# EAGLE board Line sensors - 6 (EAGLE 9.5.2)
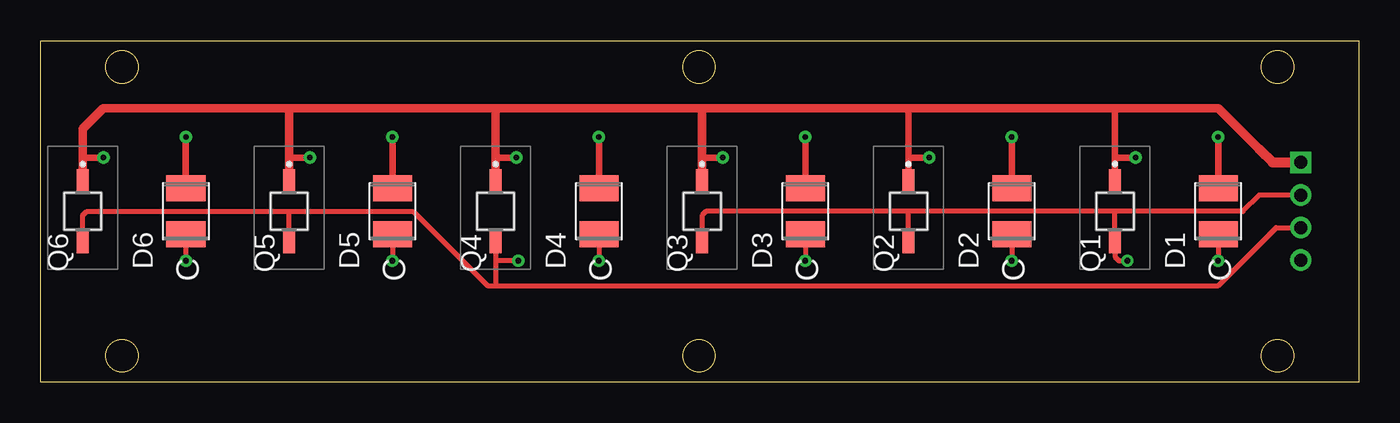
[diagram p0: board, top side]
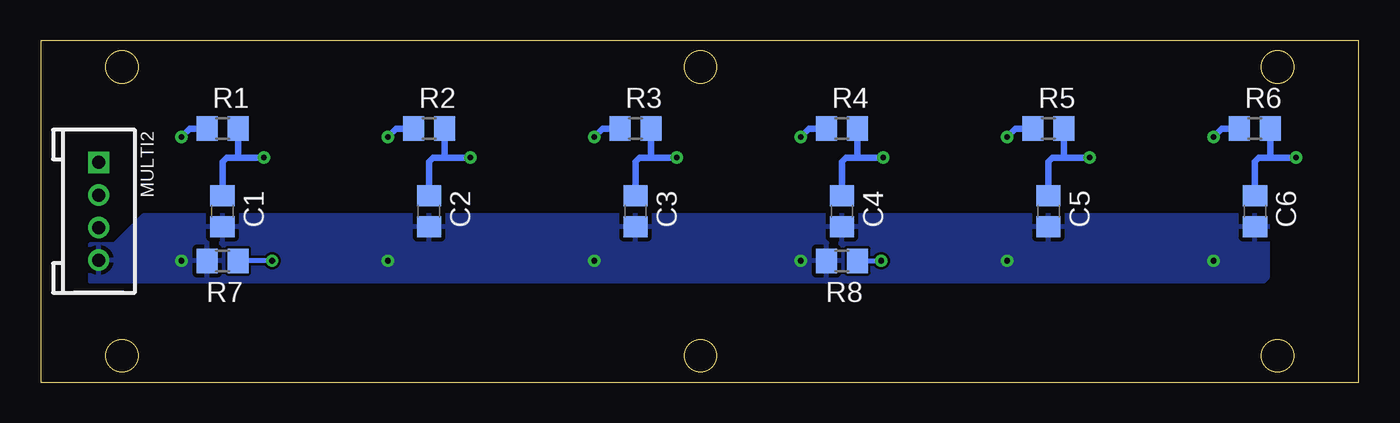
[diagram p1: board, bottom side, seen from below]

Size 81.09 x 21 mm. Coordinates in mm from the lower left corner, seen from the top.
Outline: 81.09,21 81.09,0 0,0 0,21 81.09,21
Outline: circle at 76.09,1.62 radius 1
Outline: circle at 76.09,19.38 radius 1
Outline: circle at 76.09,19.38 radius 1
Outline: circle at 5,19.38 radius 1
Outline: circle at 76.09,1.62 radius 1
Outline: circle at 40.5,19.38 radius 1
Outline: circle at 5,1.62 radius 1
Outline: circle at 40.5,1.62 radius 1
Outline: circle at 5,1.62 radius 1
Outline: circle at 40.5,1.62 radius 1
Outline: circle at 40.5,19.38 radius 1
Outline: circle at 5,19.38 radius 1
Copper layers (1*16): Top 0.035mm / dielectric 1.5mm / Bottom 0.035mm
Design rules "default": minimum track width 6mil, minimum drill 0.35mm, track to track 6mil, track to pad 6mil, pad to pad 6mil, via to via 6mil, smd to smd 6mil, copper to edge 40mil, drill to drill 6mil, minimum pad ring 10mil, minimum via ring 8mil, stop-mask expansion 4mil, vias tented up to drill 0mil, thermal gap 10mil

## Footprints (pad centres in the part's own frame; a part is rotated, then mirrored left to right if it is on the bottom)
C0805 = smd 1.3 x 1.5: 1 -0.95,0; 2 0.95,0
3528-2PIN = smd 1.6 x 2.4: 1 -1.425,0; 2 1.425,0
2.0_1X4 = drill 0.8 pad 1.27 square: 1 -3,0 | drill 0.8 pad 1.27: 2 -1,0; 3 1,0; 4 3,0
VEMT2520X01 = smd 1.35 x 0.75: 1 -1.9,0; 2 1.9,0
R0805 = smd 1.3 x 1.5: 1 -0.95,0; 2 0.95,0

## Placement (x,y rotation side)
C1  [C0805]  69.9,10.51 270 bottom
C2  [C0805]  57.2,10.51 270 bottom
C3  [C0805]  44.5,10.51 270 bottom
C4  [C0805]  31.8,10.51 270 bottom
C5  [C0805]  19.1,10.51 270 bottom
C6  [C0805]  6.4,10.51 270 bottom
D1  [3528-2PIN]  72.44,10.51 90 top
D2  [3528-2PIN]  59.74,10.51 90 top
D3  [3528-2PIN]  47.04,10.51 90 top
D4  [3528-2PIN]  34.34,10.51 90 top
D5  [3528-2PIN]  21.64,10.51 90 top
D6  [3528-2PIN]  8.94,10.51 90 top
MULTI2  TWIG_2.0  [2.0_1X4]  77.52,10.51 270 bottom
Q1  VEMT2520X01  [VEMT2520X01]  66.09,10.51 270 top
Q2  VEMT2520X01  [VEMT2520X01]  53.39,10.51 270 top
Q3  VEMT2520X01  [VEMT2520X01]  40.69,10.51 270 top
Q4  VEMT2520X01  [VEMT2520X01]  27.99,10.51 270 top
Q5  VEMT2520X01  [VEMT2520X01]  15.29,10.51 270 top
Q6  VEMT2520X01  [VEMT2520X01]  2.59,10.51 270 top
R1  [R0805]  69.9,15.59 0 bottom
R2  [R0805]  57.2,15.59 0 bottom
R3  [R0805]  44.5,15.59 0 bottom
R4  [R0805]  31.8,15.59 0 bottom
R5  [R0805]  19.1,15.59 0 bottom
R6  [R0805]  6.4,15.59 0 bottom
R7  [R0805]  69.9,7.46 0 bottom
R8  [R0805]  31.8,7.46 0 bottom

## Library data of the parts
C1-C6 = rcl; SPICEPREFIX: C
D1-D6 = Wurth_Elektronik_Optoelectronics_rev15b; COMPANY-URL: http://www.we-online.de; CREATED-BY: Christin Otto; CREATED-DATE: APR 2013; DATASHEET-URL: http://katalog.we-online.de/en/led/WL-SMTW?m=t&sq=smtw&sp=&sp=http%3A%2F%2Fwww.we-online.de%2Fweb%2Fen%2Felectronic_components%2Fsearchpage_PBS.php%3Fsearch%3Dsmtw; MANUFACTURER: Würth Elektronik eiSos GmbH
MULTI2 = CONNECTER
Q1-Q6 = Fototransistor; DESCRIPTION: Vishay VEMT2520X01 +/-15 IR + Visible Light Phototransistor, Surface Mount 2-Pin Reverse Gullwing Package; HEIGHT: 2mm; MANUFACTURER_NAME: Vishay; MANUFACTURER_PART_NUMBER: VEMT2520X01; MOUSER_PART_NUMBER: 782-VEMT2520X01; MOUSER_PRICE-STOCK: https://www.mouser.com/Search/Refine.aspx?Keyword=782-VEMT2520X01; RS_PART_NUMBER: 7689417P; RS_PRICE-STOCK: http://uk.rs-online.com/web/p/products/7689417P
R1-R8 = rcl; SPICEPREFIX: R

## Nets
GND: C1.2 C2.2 C3.2 C4.2 C5.2 C6.2 D1.1 D2.1 D3.1 D4.1 D5.1 D6.1 MULTI2.4 R7.1 R8.1
N$1: D1.2 R1.1
N$2: D2.2 R2.1
N$3: D3.2 R3.1
N$4: D4.2 R4.1
N$5: D5.2 R5.1
N$6: D6.2 R6.1
SIG1: MULTI2.2 Q1.2 Q2.2 Q3.2 R7.2
SIG2: MULTI2.3 Q4.2 Q5.2 Q6.2 R8.2
V+: C1.1 C2.1 C3.1 C4.1 C5.1 C6.1 MULTI2.1 Q1.1 Q2.1 Q3.1 Q4.1 Q5.1 Q6.1 R1.2 R2.2 R3.2 R4.2 R5.2 R6.2

## Tracks (layer width: path | path; a pad name or v marks a point on that pad's centre or on a via)
GND  (via drill 0.35)
  Top 0.305: D6.1 v8.94,7.46 | D5.1 v21.64,7.46 | D4.1 v34.34,7.46 | D3.1 v47.04,7.46 | D2.1 v59.74,7.46 | D1.1 v72.44,7.46
  pour Bottom: 5.64,10.25 5.64,6.44 5.89,6.19 78.03,6.19 78.03,8.48 76.5,8.48 74.72,10.25
N$1  (via drill 0.35)
  Top 0.406: v72.44,15.08 D1.2
  Bottom 0.406: R1.1 71.93,15.59 v72.44,15.08
N$2  (via drill 0.35)
  Top 0.406: v59.74,15.08 D2.2
  Bottom 0.406: R2.1 59.23,15.59 v59.74,15.08
N$3  (via drill 0.35)
  Top 0.406: v47.04,15.08 D3.2
  Bottom 0.406: R3.1 46.53,15.59 v47.04,15.08
N$4  (via drill 0.35)
  Top 0.406: v34.34,15.08 D4.2
  Bottom 0.406: R4.1 33.83,15.59 v34.34,15.08
N$5  (via drill 0.35)
  Top 0.406: v21.64,15.08 D5.2
  Bottom 0.406: R5.1 21.13,15.59 v21.64,15.08
N$6  (via drill 0.35)
  Top 0.406: v8.94,15.08 D6.2
  Bottom 0.406: R6.1 8.43,15.59 v8.94,15.08
SIG1  (via drill 0.35)
  Top 0.305: 66.09,10.51 73.96,10.51 74.96,11.51 MULTI2.2 | 66.09,10.51 53.39,10.51 | 53.39,10.51 40.94,10.51 40.69,10.25 Q3.2 | Q2.2 53.39,10.51 | 66.09,10.51 Q1.2 66.09,7.71 66.34,7.46 v66.85,7.46
  Bottom 0.305: v66.85,7.46 R7.2
SIG2  (via drill 0.35)
  Top 0.305: Q6.2 2.59,10.25 2.84,10.51 15.29,10.51 | Q5.2 15.29,10.51 | 27.99,5.94 72.44,5.94 76.01,9.51 MULTI2.3 | 15.29,10.51 22.91,10.51 27.48,5.94 27.99,5.94 | Q4.2 27.99,7.46 | 27.99,7.46 27.99,5.94 | v29.38,7.46 27.99,7.46
  Bottom 0.305: R8.2 v29.38,7.46
V+  (via drill 0.35)
  Top 0.406: Q1.1 66.09,13.81 | 66.09,13.81 66.09,16.86 | 66.09,13.81 v67.36,13.81 | Q2.1 53.39,13.81 | 53.39,13.81 53.39,16.86 | 53.39,13.81 v54.66,13.81 | 40.69,13.81 v41.96,13.81 | 27.99,13.81 v29.26,13.81 | 15.29,13.81 v16.56,13.81 | 2.59,13.81 v3.86,13.81
  Top 0.508: 40.69,16.86 53.39,16.86 66.09,16.86 72.44,16.86 74.98,14.32 | 40.69,16.86 27.99,16.86 | 27.99,16.86 15.29,16.86 | 15.29,16.86 3.86,16.86 2.59,15.59 2.59,13.81 Q6.1 | Q5.1 15.29,13.81 15.29,16.86 | Q4.1 27.99,13.81 27.99,16.86 | Q3.1 40.69,13.81 40.69,16.86
  Top 0.61: 74.98,14.32 75.79,13.51 MULTI2.1
  Bottom 0.406: v67.36,13.81 69.01,13.81 | 69.01,13.81 69.64,13.81 69.9,13.56 C1.1 | R1.2 68.95,13.87 69.01,13.81 | v54.66,13.81 56.31,13.81 | 56.31,13.81 56.94,13.81 57.2,13.56 C2.1 | R2.2 56.25,13.87 56.31,13.81 | C3.1 44.5,13.56 44.24,13.81 43.48,13.81 | v41.96,13.81 43.48,13.81 | R3.2 43.55,13.88 43.48,13.81 | v29.26,13.81 30.78,13.81 | 30.78,13.81 31.54,13.81 31.8,13.56 C4.1 | R4.2 30.85,13.88 30.78,13.81 | v16.56,13.81 18.08,13.81 | 18.08,13.81 18.84,13.81 19.1,13.56 C5.1 | R5.2 18.15,13.88 18.08,13.81 | v3.86,13.81 5.38,13.81 | 5.38,13.81 6.14,13.81 6.4,13.56 C6.1 | R6.2 5.45,13.88 5.38,13.81